# EAGLE board Tutorial (EAGLE 7.5.0)
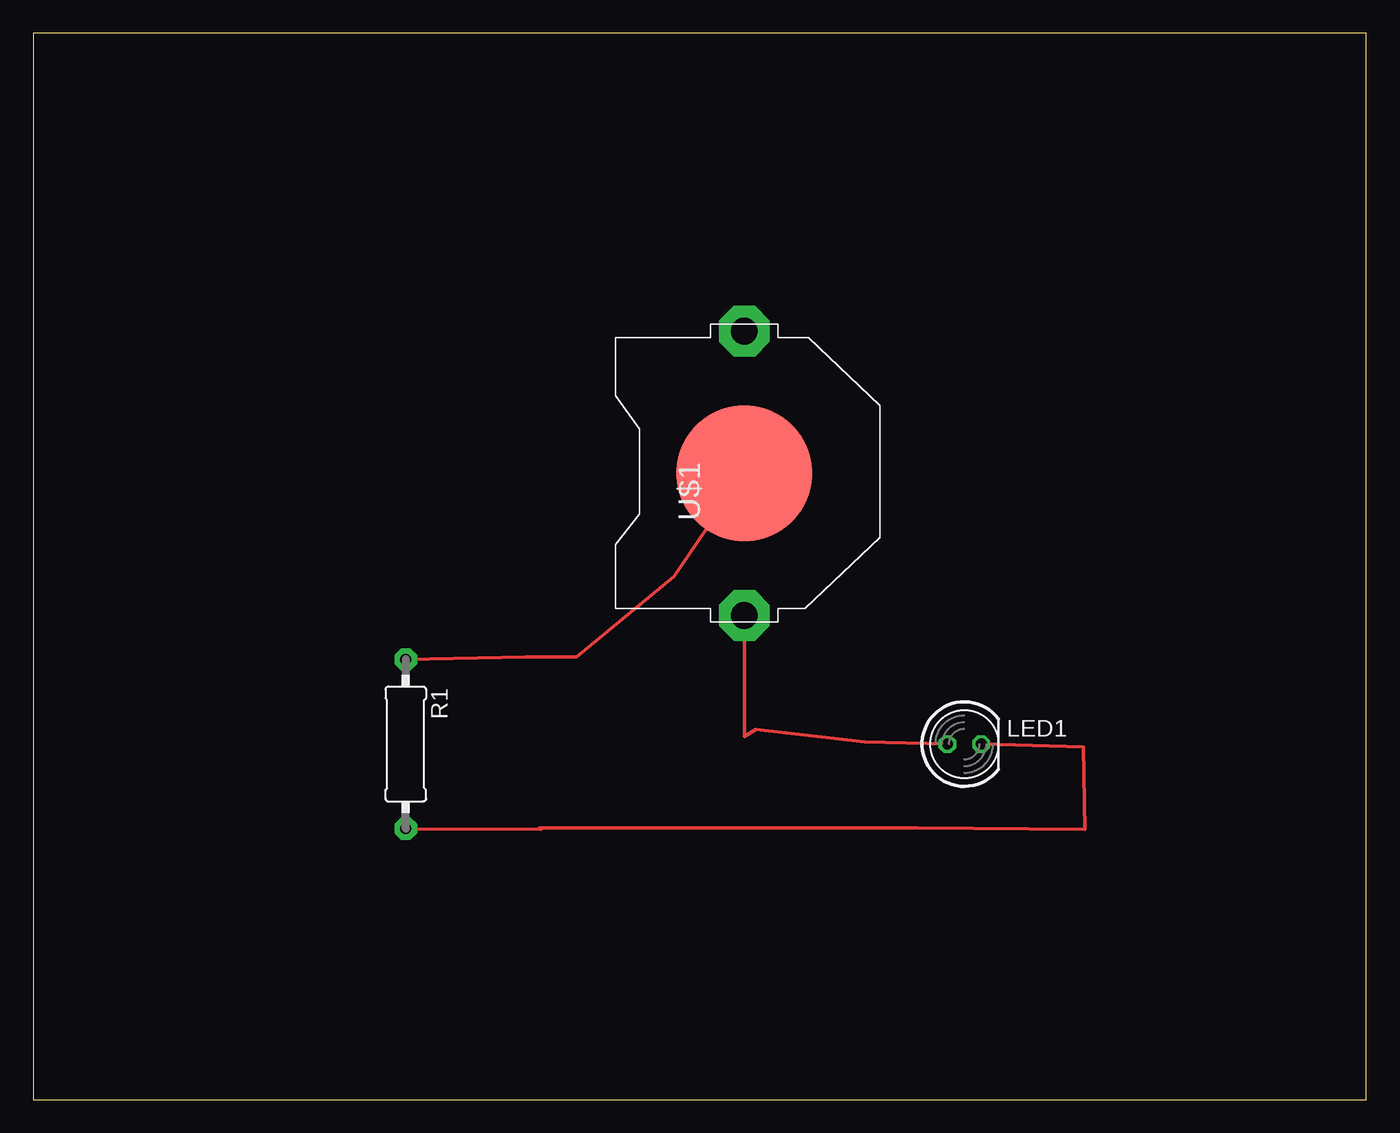
[diagram p0: board, top side]

Size 100 x 80 mm. Coordinates in mm from the lower left corner, seen from the top.
Outline: 0,0 100,0 100,80 0,80 0,0
Copper layers (1*16): Top 0.035mm / dielectric 1.5mm / Bottom 0.035mm
Design rules "default": minimum track width 10mil, minimum drill 24mil, track to track 8mil, track to pad 8mil, pad to pad 8mil, via to via 8mil, smd to smd 8mil, copper to edge 40mil, drill to drill 8mil, minimum pad ring 10mil, minimum via ring 8mil, stop-mask expansion 4mil, vias tented up to drill 0mil, thermal gap 10mil

## Footprints (pad centres in the part's own frame; a part is rotated, then mirrored left to right if it is on the bottom)
LED5MM = drill 0.813 octagon: A -1.27,0; K 1.27,0
0309/12 = drill 0.813 pad 1.676 octagon: 1 -6.35,0; 2 6.35,0
CR2032-THRU = drill 2 pad 3.81 octagon: +1 -10.668,0; +2 10.668,0 | smd 10.16 x 10.16: - 0,0

## Placement (x,y rotation side)
LED1  [LED5MM]  69.85,26.67 0 top
R1  [0309/12]  27.94,26.67 270 top
U$1  [CR2032-THRU]  53.34,46.99 90 top

## Library data of the parts
LED1 = led
R1 U$1 = adafruit

## Nets
N$1: LED1.A U$1.+1
N$2: LED1.K R1.2
N$3: R1.1 U$1.-

## Tracks (layer width: path | path; a pad name or v marks a point on that pad's centre or on a via)
N$1
  Top 0.254: LED1.A 62.41,26.85 54.2,27.76 53.37,27.23 U$1.+1
N$2
  Top 0.254: LED1.K 78.79,26.47 78.89,20.27 66.32,20.4 37.97,20.4 38.1,20.27 R1.2
N$3
  Top 0.254: R1.1 36.93,33.2 40.74,33.2 48.06,39.24 U$1.-